# Altium PCB rhd_board_rev2.PcbDoc
Units mm, origin at the board's own origin, x right, y up, seen from the top; angles counter-clockwise.
Board outline 12.1 x 14.5 mm, 3 copper layers (Top Layer, Mid-Layer 2, Bottom Layer), stack 0.13 mm thick; 26 components, 58 nets, 179 pads, 0 vias.
Unrouted connection lines stored in the file: 88.
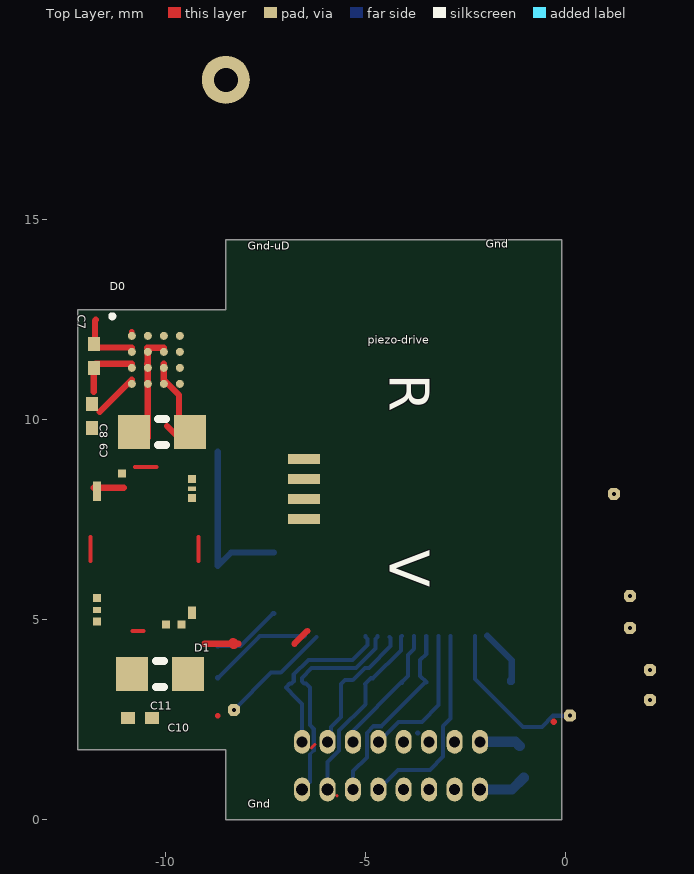
[diagram p0: Top Layer view]
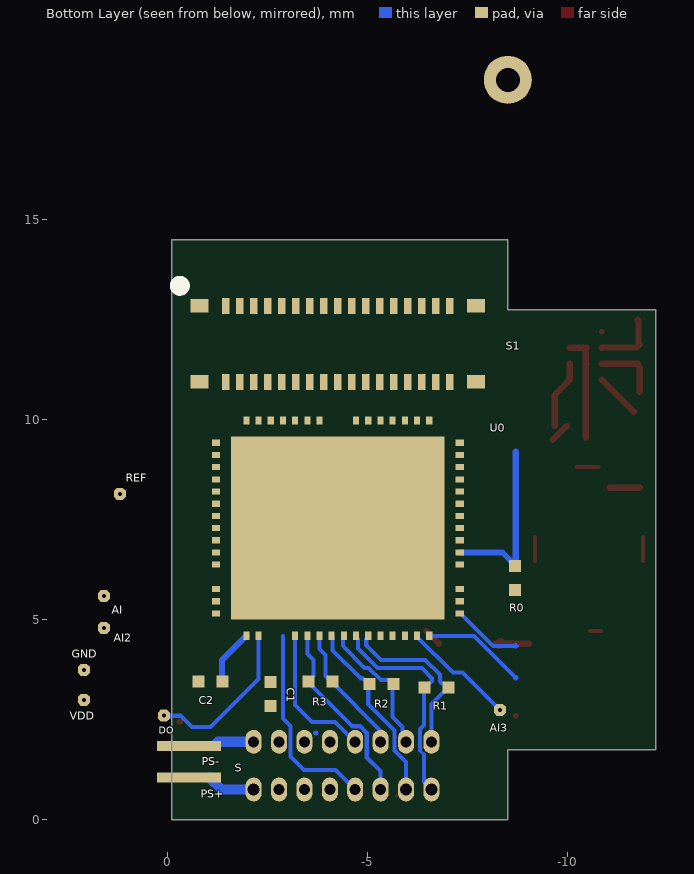
[diagram p1: Bottom Layer view, seen from below]
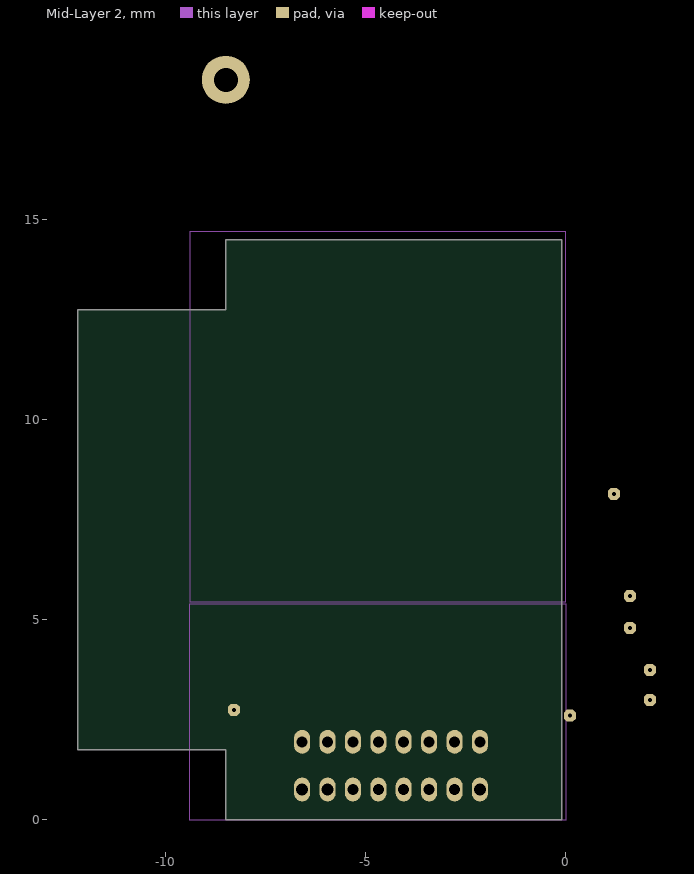
[diagram p2: Mid-Layer 2]

## Layer stack, top to bottom
Top Layer: signal copper 0.012
Dielectric 1: core 0.022, FR-4, Dk 4.2
Adhesive 1: prepreg 0.025, Dk 4.2
Mid-Layer 2: signal copper 0.012
Adhesive 2: prepreg 0.025, Dk 4.2
Dielectric2: core 0.022, FR-4, Dk 4.2
Bottom Layer: signal copper 0.012

## Board outline
-8.5,12.75 -12.2,12.75 -12.2,1.75 -8.5,1.75 -8.5,0 -0.1,0 -0.1,14.5 -8.5,14.5
board region drive_intan: -8.8,12.75 -8.5,12.75 -8.5,1.75 -8.8,1.75
board region intan: -8.5,14.5 -0.1,14.5 -0.1,0 -8.5,0
board region drive: -8.8,1.75 -12.2,1.75 -12.2,12.75 -8.8,12.75

## Design rules (kind name [scope] priority, off if disabled: settings)
Clearance [All] p1: gap=0.025 ignorepadtopadclearanceinfootprint=TRUE
ComponentClearance [All] p1: gap=0.127 collisioncheckmode=3 verticalgap=0.254 showdistances=TRUE
DiffPairsRouting [InDifferentialPairClass('All Differential Pairs')] p1: maxlimit=2.54 minlimit=0.127 mostfreqgap=0.127 toplayer_minwidth=0.076 toplayer_maxwidth=0.381 toplayer_prefwidth=0.254 midlayer1_minwidth=0.076 midlayer1_maxwidth=0.381 midlayer1_prefwidth=0.254 bottomlayer_minwidth=0.076 bottomlayer_maxwidth=0.381 bottomlayer_prefwidth=0.254 maxuncoupledlength=12.7
HoleToHoleClearance [All] p1: gap=0.127 allowstackedmicrovias=TRUE
LayerPairs [All] p1 off: enforce=TRUE
MatchedLengths DiffPair_MatchedLengths [InDifferentialPair ('D_MOSI')] p1: tolerance=25.4 checknetsindiffpair=FALSE checkdiffpairvsdiffpair=TRUE checkxsignals=TRUE checkothers=TRUE
MinimumSolderMaskSliver [All] p1: minsoldermaskwidth=0.051
PasteMaskExpansion [All] p1 off: expansion=0
PermittedLayers [All] p1: toplayerpermitted=TRUE bottomlayerpermitted=TRUE
PlaneConnect [All] p1: pad.planeconnectstyle=Relief pad.reliefexpansion=0.508 pad.reliefentries=4 pad.reliefconductorwidth=0.254 pad.reliefairgap=0.254 via.planeconnectstyle=Direct via.reliefexpansion=0.508 via.reliefentries=4 via.reliefconductorwidth=0.254 via.reliefairgap=0.254
PolygonConnect [All] p1: connectstyle=Relief reliefconductorwidth=0.254 reliefentries=4 polygonreliefangle="90 Angle" airgapwidth=0.254
RoutingCorners [All] p1: cornerstyle=Round minsetback=2.54 maxsetback=2.54
RoutingVias [All] p1: holewidth=0.102 width=0.356 viastyle="Through Hole" minholewidth=0.102 minwidth=0.254 maxholewidth=0.254 maxwidth=0.508
SilkToSolderMaskClearance [IsPad] p1 off: minsilkscreentomaskgap=0.254 clearancetoexposedcopper=TRUE
SolderMaskExpansion [All] p1 off: expansion=0.051 soldermaskfromhole=TRUE
UnRoutedNet [All] p1: checkbadconnections=TRUE
Width Width_elect_net [InNetClass('electrode_net')] p1: maxlimit=0.152 minlimit=0.051 preferedwidth=0.076
Width Width_width [InNetClass('signal_net')] p2: maxlimit=0.152 minlimit=0.051 preferedwidth=0.076
Width Width_power [InNetClass('pow_net')] p3: maxlimit=0.254 minlimit=0.152 preferedwidth=0.254
Width Width_signal [InNetClass('All Nets')] p4: maxlimit=0.152 minlimit=0.051 preferedwidth=0.076
20 further rules are at their usual default settings.

## Classes and differential pairs
net class pow_net: GND NetC2_1 NetR0_2 STIM+ STIM- VCC VCC-udrive
net class signal_net: CS+ CS- MISO+ MISO- MOSI+ MOSI- NetAI2_1 NetAI3_1 NetAI_1 NetS1_B2 NetS1_B3 NetS1_B4 NetS1_B5 NetS1_B6 NetS1_B7 NetS1_B8 NetS1_B9 NetS1_B10 NetS1_B11 NetS1_B12 NetS1_B13 NetS1_B14 NetS1_B15 NetS1_B16 NetS1_B17 SCL SCLK+ SCLK- SDA
net class electrode_net: NetS1_B2 NetS1_B3 NetS1_B4 NetS1_B5 NetS1_B6 NetS1_B7 NetS1_B8 NetS1_B9 NetS1_B10 NetS1_B11 NetS1_B12 NetS1_B13 NetS1_B14 NetS1_B15 NetS1_B16 NetS1_B17 S0 S1 S2 S3 S4 S5 S6 S7 S24 S25 S26 S27 S28 S29 S30 S31
differential pair D_CS: +CS+ -CS-
differential pair D_SCLK: +SCLK+ -SCLK-
differential pair D_MOSI: +MOSI+ -MOSI-
differential pair D_MISO: +MISO+ -MISO-

## Components (designator, comment, footprint, x,y, rotation, side; value= is the part's Value field where it differs from the comment)
AI "PCB Test Point" TESTPOINT_SMALL 1.6,5.596 r180 bottom
AI2 "PCB Test Point" TESTPOINT_SMALL 1.6,4.8 r90 bottom
AI3 "PCB Test Point" TESTPOINT_SMALL -8.3,2.75 r90 bottom
C1 "100nF" 0402-SMALL -2.569,3.148 r270 bottom
C2 "10nF" 0402-SMALL -1.076,3.45 r180 bottom
C7 "470n" CAPC0603X03L -11.8,11.6 r270 top
C8 "10u" CAPC1608X09L -10.1,9.7 r0 top
C9 "470n" CAPC0603X03L -11.85,10.1 r90 top
C10 "470n" CAPC0603X03L -10.65,2.55 r0 top
C11 "10u" CAPC1608X09L -10.15,3.65 r180 top
D0 "NSD-2101" BGA16C40P4X4_175X175X63 -10.25,11.5 r0 top
D1 "NSE-5310_FC" NSE-5310_FC -11.157,4.77 r90 top
DO "PCB Test Point" TESTPOINT_SMALL 0.1,2.601 r90 bottom
GND "PCB Test Point" TESTPOINT_SMALL 2.1,3.75 r90 bottom
piezo-drive "sql-rv-1.8-6-12" sql-rv-1.8-6-12 -2.55,11.7 r180 top
PS+ "2-2" KP-025-04 -0.526,1.057 r0 bottom
PS- "2-2" KP-025-04 -0.526,1.842 r0 bottom
R0 "0" 0201-SMALL -8.681,6.05 r90 bottom
R1 "100" 0201-SMALL -6.723,3.304 r180 bottom
R2 "100" 0201-SMALL -5.34,3.392 r180 bottom
R3 "100" 0201-SMALL -3.816,3.452 r180 bottom
REF "PCB Test Point" TESTPOINT_SMALL 1.2,8.15 r90 bottom
S "Omnetics_PZN-16-DD" OMNETICS_PZN-16-DD -4.365,1.328 r0 bottom
S1 "Molex 3.5mm Pitch Slimstack 34 pin connector" MOLEX_504618-3412 -4.25,11.9 r180 bottom
U0 "Intan Technologies RHD2132 chip" RHD2000_56PIN_COB -4.25,7.292 r180 bottom
VDD "PCB Test Point" TESTPOINT_SMALL 2.1,3 r90 bottom

## Footprints (in the part's own frame and the unit in brackets; to place one, negate y for a bottom-side part, rotate by r counter-clockwise, add the part's x,y. Pads: shape width x height; smd on the part's side, far side on the other; paste and mask are expansions set on the pad)
0201-SMALL [mm]
  rect 0.3x0.3 smd: 1(-0.3,0) 2(0.3,0)
0402-SMALL [mm]
  rect 0.3x0.3 smd: 1(-0.302,0.002) 2(0.298,0.002)
BGA16C40P4X4_175X175X63 [mm]
  round 0.2 smd: A1(-0.6,0.6) A2(-0.2,0.6) A3(0.2,0.6) A4(0.6,0.6) B1(-0.6,0.2) B2(-0.2,0.2) B3(0.2,0.2) B4(0.6,0.2) C1(-0.6,-0.2) C2(-0.2,-0.2) C3(0.2,-0.2) C4(0.6,-0.2) D1(-0.6,-0.6) D2(-0.2,-0.6) D3(0.2,-0.6) D4(0.6,-0.6)
  silkscreen extent -1.14,1.04 -1.04,1.14, body extent -0.87,-0.88 0.88,0.87, height 0.25
CAPC0603X03L [mm]
  rect 0.35x0.3 smd: 1(-0.3,0) 2(0.3,0)
  body extent -0.67,-0.35 0.67,0.35, height 0.33
CAPC1608X09L [mm]
  rect 0.8x0.85 smd: 1(-0.7,0) 2(0.7,0)
  silkscreen extent -0.1,-0.33 0.1,0.33, body extent -1.25,-0.58 1.25,0.58, height 0.95
KP-025-04 [mm]
  rect 1.6x0.25 smd: 1(0,0)
  body extent -0.9,-0.23 0.9,0.23, height 0.03
MOLEX_504618-3412 [mm]
  rect 0.455x0.33 smd paste-1000 mask+0.035: A(-3.455,0.95) B(-3.455,-0.95) C(3.455,0.95) D(3.455,-0.95)
  rect 0.18x0.4 smd paste+0 mask+0.035: B1(-2.8,-0.95) B2(-2.45,-0.95) B3(-2.1,-0.95) B4(-1.75,-0.95) B5(-1.4,-0.95) B6(-1.05,-0.95) B7(-0.7,-0.95) B8(-0.35,-0.95) B9(0,-0.95) B10(0.35,-0.95) B11(0.7,-0.95) B12(1.05,-0.95) B13(1.4,-0.95) B14(1.75,-0.95) B15(2.1,-0.95) B16(2.45,-0.95) B17(2.8,-0.95) T1(-2.8,0.95) T2(-2.45,0.95) T3(-2.1,0.95) T4(-1.75,0.95) T5(-1.4,0.95) T6(-1.05,0.95) T7(-0.7,0.95) T8(-0.35,0.95) T9(0,0.95) T10(0.35,0.95) T11(0.7,0.95) T12(1.05,0.95) T13(1.4,0.95) T14(1.75,0.95) T15(2.1,0.95) T16(2.45,0.95) T17(2.8,0.95)
  silkscreen extent -4.08,1.33 -3.83,1.57, body extent -4.05,-1 4.05,1, height 0.58
NSE-5310_FC [mm]
  rect 0.2x0.2 smd: 3(0.19,0.56) 5(0.781,0.56) 7(3.295,0.56) 8(3.484,0.56) 8(3.587,0.56) 9(3.888,-0.057) 11(3.75,-1.807) 13(3.28,-1.807) 18(0.351,-1.807) 18(0.468,-1.807) 19(0.112,-1.161) 19(0.112,-1.549)
  rect 0.15x0.2 smd: 4(0.48,0.56)
  rect 0.116x0.116 smd: 8(3.484,0.56) 18(0.401,-1.807)
  rect 0.116x0.2 smd: 12(3.51,-1.807)
  Top Layer lines w0.1: 1.7,0.727 2.3,0.727 ; -0.05,-0.323 -0.05,-0.6 ; 4.05,-0.386 4.05,-0.923 ; 1.7,-1.973 2.3,-1.973
  body extent -0.2,-2.12 4.2,0.88, height 1.02
OMNETICS_PZN-16-DD [mm]
  oval 0.4x0.6 hole 0.3 mask+0.05: B1(2.219,0.571) B7(-1.591,0.571) B8(-2.226,0.571)
  oval 0.4x0.6 hole 0.275 mask+0.05: B2(1.584,0.571) B3(0.949,0.571) B4(0.314,0.571) B5(-0.321,0.571) B6(-0.956,0.571) T1(2.219,-0.622) T2(1.584,-0.622) T3(0.949,-0.622) T4(0.314,-0.622) T5(-0.321,-0.622) T6(-0.956,-0.622) T7(-1.591,-0.622) T8(-2.226,-0.622)
RHD2000_56PIN_COB [mil]
  rect 8x6 smd paste+0: 1(-120,84) 2(-120,72) 3(-120,60) 4(-120,48) 5(-120,36) 6(-120,24) 7(-120,12) 8(-120,0) 9(-120,-12) 10(-120,-24) 11(-120,-36) 12(-120,-60) 13(-120,-72) 14(-120,-84) 29(120,-84) 30(120,-72) 31(120,-60) 32(120,-36) 33(120,-24) 34(120,-12) 35(120,0) 36(120,12) 37(120,24) 38(120,36) 39(120,48) 40(120,60) 41(120,72) 42(120,84)
  rect 6x8 smd paste+0: 15(-90,-106) 16(-78,-106) 17(-42,-106) 18(-30,-106) 19(-18,-106) 20(-6,-106) 21(6,-106) 22(18,-106) 23(30,-106) 24(42,-106) 25(54,-106) 26(66,-106) 27(78,-106) 28(90,-106) 43(90,106) 44(78,106) 45(66,106) 46(54,106) 47(42,106) 48(30,106) 49(18,106) 50(-18,106) 51(-30,106) 52(-42,106) 53(-54,106) 54(-66,106) 55(-78,106) 56(-90,106)
  rect 210x180 smd paste+0: CENTER(0,0)
  body extent -128,-114 128,114
sql-rv-1.8-6-12 [mm]
  rect 0.8x0.25 smd: P1-1(4,2.685) P1-2(4,4.185) P2-1(4,3.185) P2-2(4,3.685)
  Top Layer region: 0,0
  Top Layer region: 0,0
  body extent -0.02,0 4.5,6, height 2.78
TESTPOINT_SMALL [mm]
  oct 0.3x0.3 hole 0.1: 1(0,0)

## Part data
AI AI2 AI3 DO GND REF VDD: library part TESTPOINT_SMALL, DeviceName=_SMALL, DeviceSetName=TESTPOINT, GateName_1=TP$1, LibraryName=RHD2000_eval_board, Package=TESTPOINT_SMALL, SymbolName_1=TESTPOINT
C1 C2: library part C_0402, Package=0201, DeviceName=_0201, DeviceSetName=C, GateName_1=C, LibraryName=RHD2000_eval_board, SymbolName_1=C
C7 C9 C10: library part Cap-0201, "Capacitor", LatestRevisionDate=10-Jul-2010, Publisher=RVS
C8 C11: library part Cap-0603, "Capacitor", LatestRevisionDate=10-Jul-2010, Publisher=RVS
piezo-drive: "Squiggle motor"
PS+ PS-: library part KP-025X04
R0 R1 R2 R3: library part R_0402, Package=0201, DeviceName=_0201, DeviceSetName=R, GateName_1=R, LibraryName=RHD2000_eval_board, SymbolName_1=R
S: Package=OMNETICS_PZN-12-AA, DeviceSetName=RHD2000-CABLE-DAQ-SIDE, GateName_1=A, LibraryName=RHD2000_eval_board, SymbolName_1=RHD2000-CABLE
S1: library part MOLEX_504618-3412, Package=OMNETICS_A79024, DeviceSetName=OMNETICS_A79024, GateName_1=A, LibraryName=RHD2000_eval_board, SymbolName_1=OMNETICS_A7902X
U0: library part RHD2132_COB, Package=RHD2000_56PIN_COB, DeviceName=_COB, DeviceSetName=RHD2132, GateName_1=A, LibraryName=RHD2000, SymbolName_1=RHD2132

## Free pads (board coordinates)
  round 1.2 hole 0.6: 2(-8.5,18.5)

## Nets (pads, with @x,y where several pads share a name; then routed paths per layer and width w, separated by ;. In a path a pad name is that pad's centre, name@x,y a point inside that pad or via, vN(x,y) a via of type N, cw(c..) or ccw(c..) an arc to the next point about the centre after c; other vN are vias at no path point)
1-1: D0.D4 piezo-drive.P1-1
1-2: D0.C4 piezo-drive.P1-2
2-1: D0.B4 piezo-drive.P2-1
2-2: D0.A4 piezo-drive.P2-2
CS+: R1.2 S.B1 U0.19 | length 5.5
  Bottom Layer w0.076: -6.59,0.757 -6.4,0.947 ; -6.4,1.631 -6.301,1.73
  Bottom Layer w0.102: -6.4,0.947 -6.4,1.631 ; -6.4,3.3 -6.4,2.367 -6.301,2.269 -6.301,1.73 ; -6.4,3.304 -6.499,3.403 -6.539,3.403 -6.598,3.463 -6.598,3.547 -6.352,3.794 -5.245,3.794 -4.758,4.281 -4.758,4.523 -4.707,4.574 -4.707,4.6
CS-: R1.1 S.T1 U0.18 | length 4.4
  Bottom Layer w0.102: -6.59,1.95 -6.59,2.894 -6.745,3.049 -7,3.304 -6.901,3.403 -6.861,3.403 -6.802,3.463 -6.802,3.631 -6.436,3.997 -5.329,3.997 -4.961,4.365 -4.961,4.523 -5.012,4.574 -5.012,4.6
GND: C1.2 C2.2 GND.1 R0.1 S1.T1 S.T6 U0.11 U0.12 U0.17 U0.29 U0.32 U0.CENTER | length 1.7
  Bottom Layer w0.102: -8.7,4.346 -8.136,4.346 U0.29@-7.323,5.158
  Bottom Layer w0.127: U0.29@-7.323,5.158 U0.29
GND-udrive: C7.1 C8.1 C9.1 C10.2 C11.2 D0.A2 D0.B1 D0.B2 D0.C2 D0.C3 D1.7 D1.8 D1.11 pad.2 S.T5 | length 5.5
  Top Layer w0.152: D1.8@-11.8,8.3 -11.05,8.3 ; -11.75,12.5 -11.769,12.481 -11.769,11.913 -11.8,11.883 -11.726,11.809 -10.859,11.809 -10.85,11.8 ; -10.463,11.4 -10.45,11.413 D0.B2@-10.45,11.8 ; -10.463,11.8 -10.05,11.8 ; C8.1@-10.45,9.55 -10.45,11 D0.C2@-10.45,11.4 ; -6.783,4.4 -6.459,4.724
MISO+: S.B4 U0.25
MISO-: S.T4 U0.24 | length 3.6
  Bottom Layer w0.102: -4.685,1.95 -4.185,2.45 -3.6,2.45 -3.183,2.867 -3.183,4.6
MOSI+: R3.2 S.B3 U0.23 | length 4.9
  Top Layer w0.076: -5.72,0.6 -5.72,0.607
  Bottom Layer w0.102: -5.32,0.757 -5.32,1.215 -4.974,1.561 -4.974,2.17 -4.805,2.339 -4.606,2.339 -3.493,3.452 ; -3.488,3.436 -3.488,3.447 -3.64,3.599 -3.64,3.997 -3.488,4.149 -3.488,4.6
MOSI-: R3.1 S.T3 U0.22 | length 3.3
  Bottom Layer w0.076: -5.32,1.95 -5.32,2.224
  Bottom Layer w0.102: -5.32,2.224 -4.093,3.452 ; -4.1,3.424 -4.1,3.444 -3.945,3.599 -3.945,4.123 -3.793,4.276 -3.793,4.6
NetAI2_1: AI2.1 U0.15
NetAI3_1: AI3.1 U0.16 | length 2.8
  Bottom Layer w0.102: AI3.1 -7.37,3.68 -7.125,3.68 -6.231,4.574
NetAI_1: AI.1 U0.14
NetC2_1: C2.1 U0.28 | length 4
  Bottom Layer w0.102: -8.7,3.55 -7.65,4.6 U0.28
  Bottom Layer w0.152: -1.964,4.6 -1.352,3.988 -1.352,3.452 ; -1.391,3.45 -1.391,3.491
NetDO_1: DO.1 U0.27 | length 4.1
  Top Layer w0.152: -0.301,2.451 -0.3,2.45
  Bottom Layer w0.102: -2.269,4.6 -2.269,3.519 -1.069,2.319 -0.6,2.319 -0.317,2.601 DO.1@0.099,2.601
NetR0_2: R0.2 REF.1 S1.B1 U0.10 | length 4.4
  Bottom Layer w0.152: -8.7,9.2 -8.7,7.2 -8.7,6.35 -8.368,6.682 -7.298,6.682
NetS1_B2: S1.B2 U0.1
NetS1_B3: S1.B3 U0.56
NetS1_B4: S1.B4 U0.55
NetS1_B5: S1.B5 U0.54
NetS1_B6: S1.B6 U0.53
NetS1_B7: S1.B7 U0.52
NetS1_B8: S1.B8 U0.51
NetS1_B9: S1.B9 U0.50
NetS1_B10: S1.B10 U0.49
NetS1_B11: S1.B11 U0.48
NetS1_B12: S1.B12 U0.47
NetS1_B13: S1.B13 U0.46
NetS1_B14: S1.B14 U0.45
NetS1_B15: S1.B15 U0.44
NetS1_B16: S1.B16 U0.43
NetS1_B17: S1.B17 U0.42
S0: S1.T2 U0.9
S1: S1.T3 U0.8
S2: S1.T4 U0.7
S3: S1.T5 U0.6
S4: S1.T6 U0.5
S5: S1.T7 U0.4
S6: S1.T8 U0.3
S7: S1.T9 U0.2
S24: S1.T10 U0.41
S25: S1.T11 U0.40
S26: S1.T12 U0.39
S27: S1.T13 U0.38
S28: S1.T14 U0.37
S29: S1.T15 U0.36
S30: S1.T16 U0.35
S31: S1.T17 U0.34
SCL: C10.1 D0.D1 D1.13 S.B7 | length 0
  Bottom Layer w0.127: -3.704,2.17 -3.7,2.174
SCLK+: R2.2 S.B2 U0.21 | length 4.7
  Bottom Layer w0.102: -5.955,0.757 -5.955,1.441 -5.666,1.73 -5.666,2.234 -5.012,2.888 -5.012,3.392 ; -5.017,3.392 -4.87,3.539 -4.818,3.539 -4.123,4.234 -4.123,4.577 -4.1,4.6
  Bottom Layer w0.127: S.B2@-2.78,0.75 S.B2 S.B2@-2.78,0.803
SCLK-: R2.1 S.T2 U0.20 | length 3.5
  Top Layer w0.076: -6.355,1.8 -6.269,1.886
  Bottom Layer w0.102: -5.869,2.036 -5.869,2.318 -5.617,2.571 -5.617,3.392 -5.518,3.491 -5.325,3.491 -5.023,3.793 -4.923,3.793 -4.377,4.339 -4.377,4.549 -4.402,4.574
SDA: C9.2 D0.D2 D1.12 S.T7
STIM+: PS+.1 S.B8 | length 1.2
  Bottom Layer w0.254: -2.145,0.757 -1.343,0.757 PS+.1@-1.05,1.05
STIM-: PS-.1 S.T8 | length 1
  Bottom Layer w0.254: -2.145,1.95 -1.258,1.95 PS-.1@-1.15,1.842
VCC: C1.1 S.B6 U0.13 U0.26 U0.30 U0.31 VDD.1
VCC-udrive: C7.2 C8.2 C11.1 D0.A1 D0.A3 D0.B3 D0.C1 D0.D3 D1.18 D1.19 S.B5 | length 10.8
  Top Layer w0.152: -11.8,10.7 C7.2 ; C7.2@-11.75,11.4 -10.85,11.4 ; -11.65,10.2 -10.85,11 ; -10.05,11.4 -10.05,11 -9.674,10.624 C8.2@-9.674,9.849 ; -9.974,9.849 C8.2@-9.625,9.5 ; -9.033,4.4 -8.183,4.4
  Top Layer w0.254: -8.321,4.421 -8.3,4.4
  Bottom Layer w0.102: S.B5 -4.192,1.25 -3.4,1.25 -3.069,1.581 -3.069,2.339 -2.878,2.53 -2.878,4.6
pads on no net: D1.3 D1.4 D1.5 D1.9 S1.A S1.B S1.C S1.D U0.33

## Polygon pours and split planes (outlines as drawn)
GND-udrive on Mid-Layer 2 "GND-UDRIVE" (solid, shelved, pour order 6): -9.4,5.45 0,5.45 0,14.7 -9.4,14.7
VCC on Mid-Layer 2 "VCC" (solid, shelved, pour order 4): 0,5.4 0,-0.008 -9.4,-0.008 -9.4,5.4

## Silkscreen, mask and mechanical layers (free items; w line width, h text height)
Top Overlay:
  text "Gnd" at -2,14.3 h0.2
  text "Gnd-uD" at -7.95,14.25 h0.2
  text "Gnd" at -7.95,0.3 h0.2
Mechanical 5:
  lines w0.025: 1.826,8.95 12.661,8.95

## Text inside footprints (layer, text, board x,y; h text height)
piezo-drive: Top assembly "R" at -4.4,11.15 h1 r270; Top assembly "V" at -4.4,6.75 h1 r270; Top assembly "V" at -4.4,6.75 h1 r270; Top assembly "R" at -4.4,11.15 h1 r270; Top Overlay "V" at -4.4,6.75 h1 r270; Top Overlay "R" at -4.4,11.15 h1 r270